# Altium PCB Omega matrix pcb1.PcbDoc
Units mm, origin at the board's own origin, x right, y up, seen from the top; angles counter-clockwise.
Board outline 50.16 x 42.67 mm, 2 copper layers (Top Layer, Bottom Layer); 13 components, 15 nets, 70 pads, 13 vias.
Unrouted connection lines stored in the file: 8.
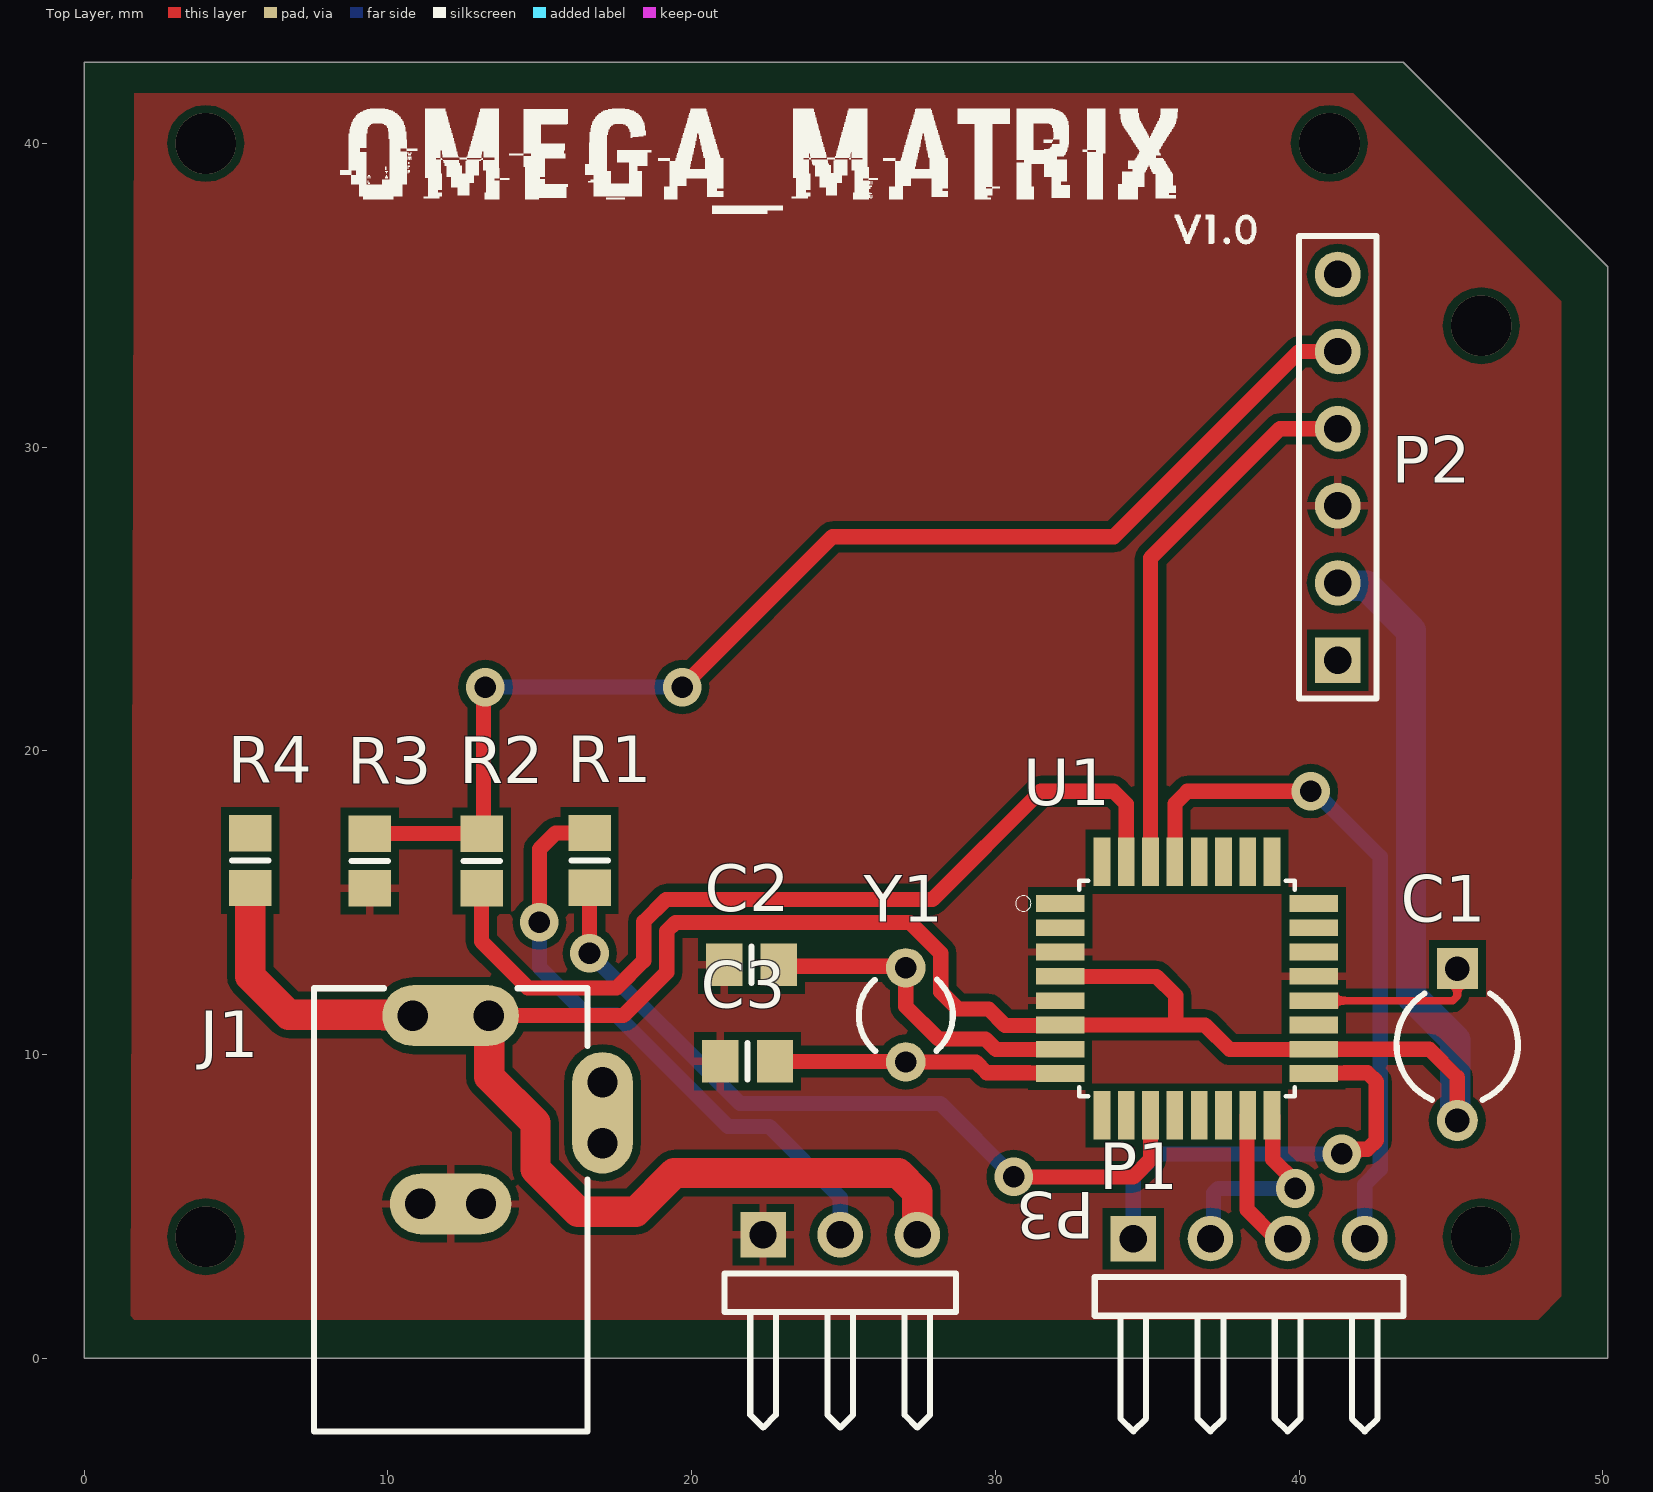
[diagram p0: Top Layer view]
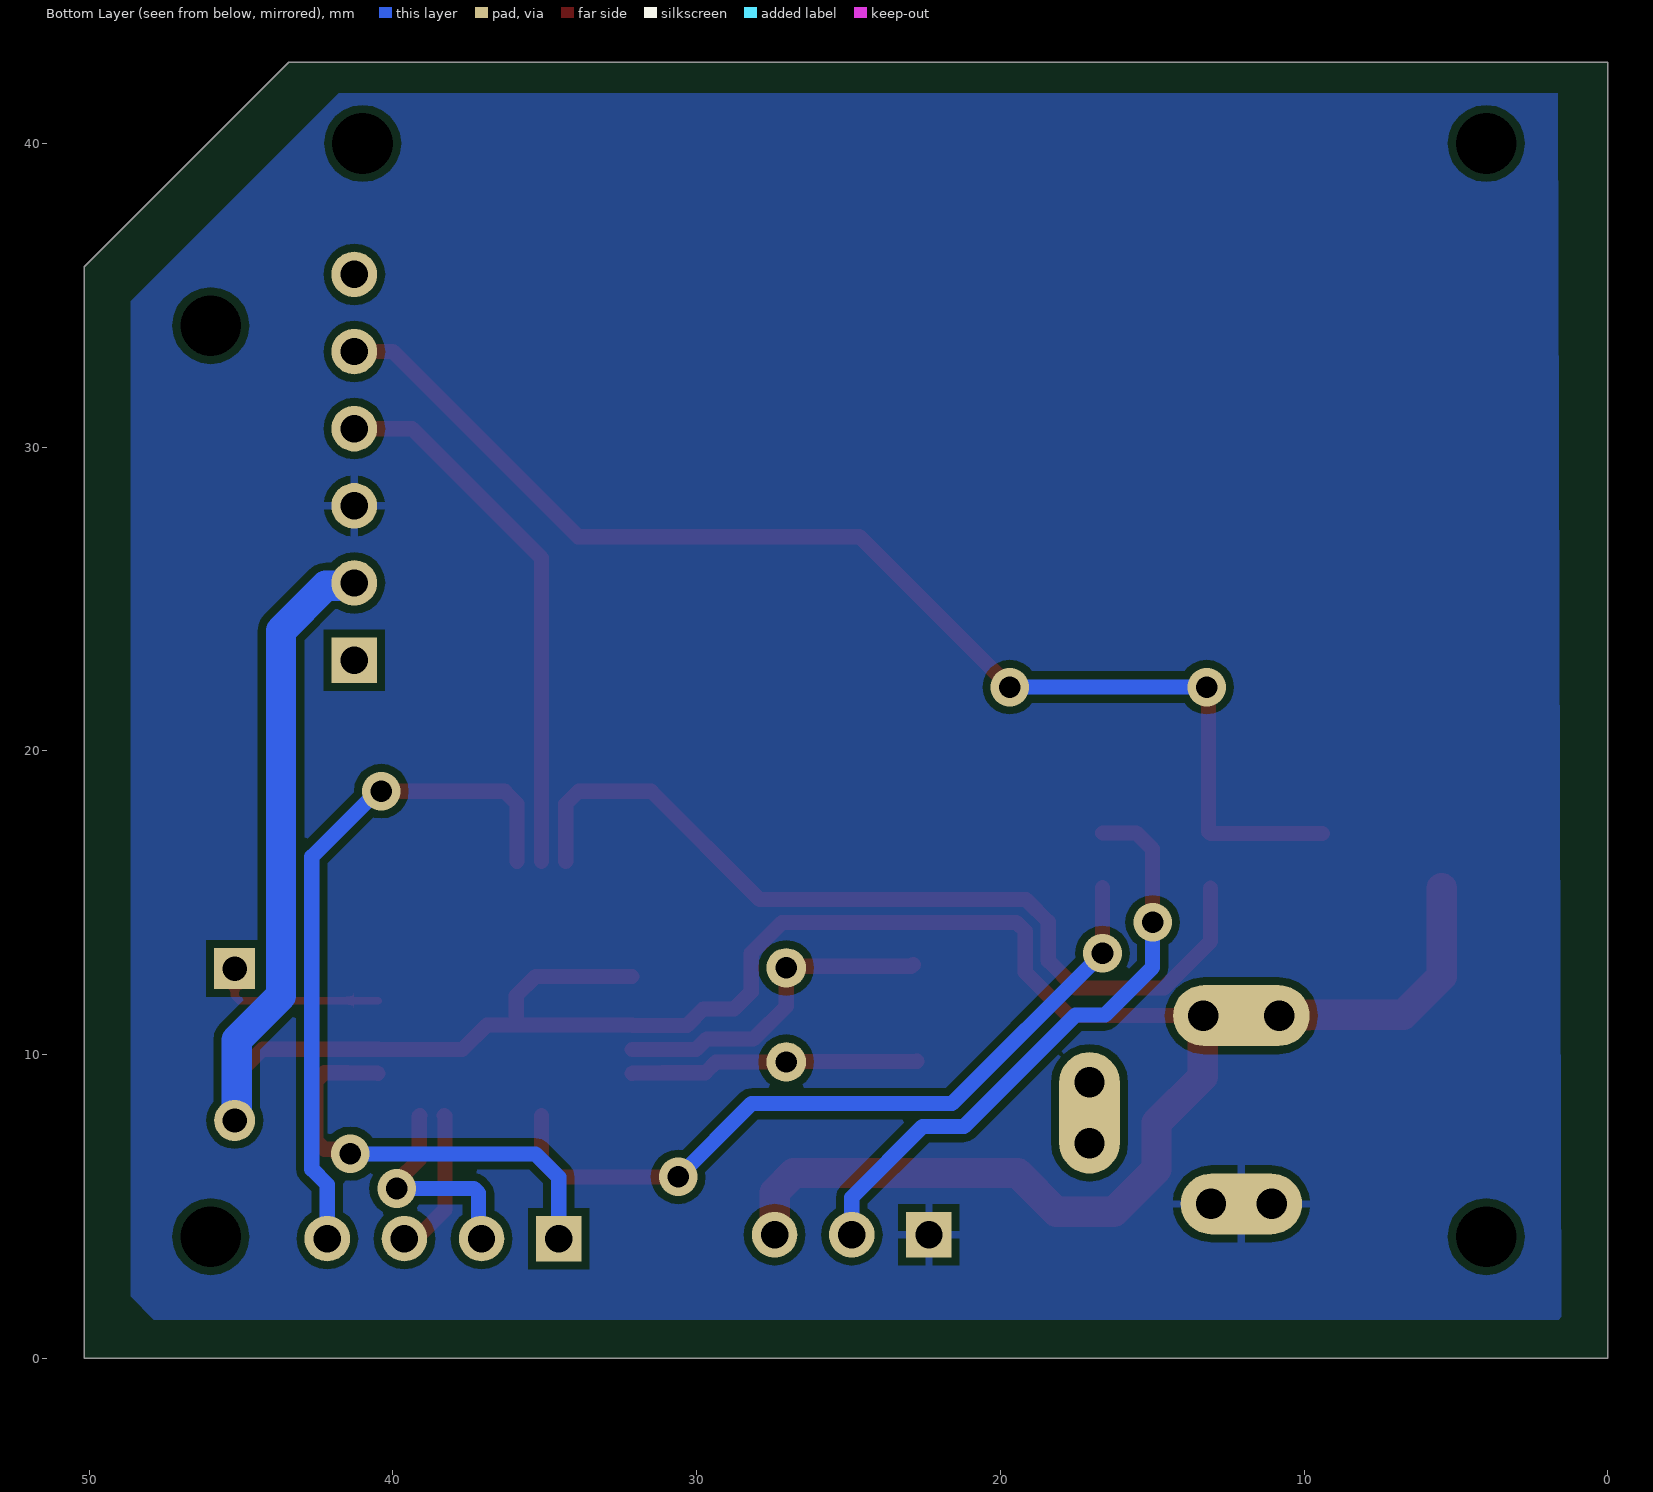
[diagram p1: Bottom Layer view, seen from below]

## Layer stack, top to bottom
Top Solder: solder mask 0.0102, Solder Resist, Dk 3.5
Top Layer: signal copper 0.0356
Dielectric 1: dielectric 0.32, FR-4, Dk 4.8
Bottom Layer: signal copper 0.0356
Bottom Solder: solder mask 0.0102, Solder Resist, Dk 3.5

## Board outline
50.165,35.941 43.434,42.672 0,42.672 0,0 50.165,0

## Design rules (kind name [scope] priority, off if disabled: settings)
Clearance [All] p1: gap=0.254 ignorepadtopadclearanceinfootprint=FALSE except(0: Arc-Hole Track-Hole SMDPad-Hole THPad-Hole Via-Hole Fill-Hole Poly-Hole Region-Hole Text-Hole)
PolygonConnect [All] p1: connectstyle=Relief reliefconductorwidth=0.254 reliefentries=4 polygonreliefangle="90 Angle" airgapwidth=0.254
RoutingVias [All] p1: holewidth=0.711 width=1.27 viastyle="Through Hole" minholewidth=0.711 minwidth=1.27 maxholewidth=0.711 maxwidth=1.27
SolderMaskExpansion [All] p1: expansion=0.102
Width POWER [InNetClass('pwr')] p1: maxlimit=2 minlimit=0.5 preferedwidth=1
Width [All] p2: maxlimit=1 minlimit=0.254 preferedwidth=0.5
30 further rules are at their usual default settings.

## Classes and differential pairs
net class pwr: "5V power" GND

## Components (designator, comment, footprint, x,y, rotation, side; value= is the part's Value field where it differs from the comment)
C1 "Cap2" CAPR5-4X5 45.212,10.327 r270 top value=47uF
C2 "Cap" 6-0805_N 21.971,12.954 r0 top value=22pF
C3 "Cap" 6-0805_N 21.844,9.779 r0 top value=22pF
J1 "PWR2.5" KLD-0202 12.065,-2.42 r90 top
P1 "Bootloader" HDR1X4H 34.544,3.937 r0 top
P2 "HC-05" HDR1X6 41.275,22.987 r90 top
P3 "Ledstrip" HDR1X3H 22.352,4.064 r0 top
R1 "Res1" 6-0805_N 16.637,16.394 r90 top value=330
R2 "Res1" 6-0805_N 13.081,16.372 r270 top value=1K
R3 "Res1" 6-0805_N 9.398,16.372 r90 top value=1.8K
R4 "Res1" 6-0805_N 5.461,16.383 r90 top value=1K
U1 "ATMEGA328PB-AU" *QFP80P900X900X120-32N 36.311,12.173 r0 top
Y1 "16MHz" R38 27.051,11.303 r0 top

## Footprints (in the part's own frame and the unit in brackets; to place one, negate y for a bottom-side part, rotate by r counter-clockwise, add the part's x,y. Pads: shape width x height; smd on the part's side, far side on the other; paste and mask are expansions set on the pad)
6-0805_N [mm] "Chip Resistor, Body 2.0x1.2mm, IPC Medium Density"
  rect 1.2x1.4 smd: 1(-0.9,0) 2(0.9,0)
  silkscreen extent 0,-0.6 0,0.6, body extent -1.07,-0.7 1.07,0.7, height 0.7
*QFP80P900X900X120-32N [mm]
  rect 1.6x0.55 smd: 1(-4.18,2.8) 2(-4.18,2) 3(-4.18,1.2) 4(-4.18,0.4) 5(-4.18,-0.4) 6(-4.18,-1.2) 7(-4.18,-2) 8(-4.18,-2.8) 17(4.18,-2.8) 18(4.18,-2) 19(4.18,-1.2) 20(4.18,-0.4) 21(4.18,0.4) 22(4.18,1.2) 23(4.18,2) 24(4.18,2.8)
  rect 0.55x1.6 smd: 9(-2.8,-4.18) 10(-2,-4.18) 11(-1.2,-4.18) 12(-0.4,-4.18) 13(0.4,-4.18) 14(1.2,-4.18) 15(2,-4.18) 16(2.8,-4.18) 25(2.8,4.18) 26(2,4.18) 27(1.2,4.18) 28(0.4,4.18) 29(-0.4,4.18) 30(-1.2,4.18) 31(-2,4.18) 32(-2.8,4.18)
  silkscreen extent -5.64,-3.55 3.55,3.55, body extent -4.51,-4.51 4.51,4.51, height 1.15
CAPR5-4X5 [mm] "Capacitor; 2 Leads"
  rect 1.35x1.35 hole 0.8: 1(-2.5,0)
  round 1.35 hole 0.8: 2(2.5,0)
  silkscreen extent -1.69,-2 1.82,2
HDR1X3H [mm] "Connector; Header; 3 Position; Right Angle"
  rect 1.5x1.5 hole 0.9: 1(0,0)
  round 1.5 hole 0.9: 2(2.54,0) 3(5.08,0)
  silkscreen extent -1.27,-6.35 6.35,-1.27
HDR1X4H [mm] "Connector; Header; 4 Position; Right Angle"
  rect 1.5x1.5 hole 0.9: 1(0,0)
  round 1.5 hole 0.9: 2(2.54,0) 3(5.08,0) 4(7.62,0)
  silkscreen extent -1.27,-6.35 8.89,-1.27
HDR1X6 [mm] "Connector; Header; 6 Position"
  rect 1.5x1.5 hole 0.9: 1(0,0)
  round 1.5 hole 0.9: 2(2.54,0) 3(5.08,0) 4(7.62,0) 5(10.16,0) 6(12.7,0)
  silkscreen extent -1.27,-1.27 13.97,1.27
KLD-0202 [mm] "DC Power Jack, 2.5mm, KLD Series, PCB Mount"
  oval 2x4.5 all layers, no hole: 1(13.7,0)
  round 1.5 hole 1: 1A(13.7,-1.25) 1B(13.7,1.25) 2A(7.5,-1) 2B(7.5,1) 3A(9.5,-5) 3B(11.5,-5)
  oval 2x4 all layers, no hole: 2(7.5,0)
  oval 4x2 all layers, no hole: 3(10.5,-5)
  silkscreen extent 0,-4.5 14.6,4.5
R38 [mm] "Crystal, Thru-Hole; 2 Leads; Body 3.1 x 8.2 mm (Dia.xH)"
  round 1.3 hole 0.7: 1(0,1.55) 2(0,-1.55)
  silkscreen extent -1.55,-1.19 1.55,1.17

## Part data
C1 C2 C3: "Capacitor", Publisher="Altium Limited"
  C1: PackageDescription="Capacitor; 2 Leads", PackageReference=CAPR5-4X5, Published=23-Sep-2002
  C2 C3: LatestRevisionDate=17-Jul-2002, LatestRevisionNote="Re-released for DXP Platform.", PackageDescription="Radial Cap, Thru-Hole; 2 Leads; 0.3 in Pin Spacing", PackageReference=RAD-0.3, Published=8-Jun-2000
J1: "Low Voltage Power Supply Connector", ComponentLink1Description="Manufacturer Link", ComponentLink1URL=http://domino.kycon.com/internet/Products.html, DatasheetDocument=09-May-2002, Published=17-Dec-2003, Publisher="Altium Limited"
P1: library part "Header 4H", "Header, 4-Pin, Right Angle", LatestRevisionDate=17-Jul-2002, LatestRevisionNote="Re-released for DXP Platform.", Publisher="Altium Limited"
P2: library part "Header 6", "Header, 6-Pin", LatestRevisionDate=17-Jul-2002, LatestRevisionNote="Re-released for DXP Platform.", Publisher="Altium Limited"
P3: library part "Header 3", "Header, 3-Pin", LatestRevisionDate=17-Jul-2002, LatestRevisionNote="Re-released for DXP Platform.", Publisher="Altium Limited"
R1 R2 R3 R4: "Resistor", LatestRevisionDate=17-Jul-2002, LatestRevisionNote="Re-released for DXP Platform.", PackageDescription="Axial Device, Thru-Hole; 2 Leads; 0.3 in Pin Spacing", PackageReference=AXIAL-0.3, Published=8-Jun-2000, Publisher="Altium Limited"
U1: "AVR AVR® ATmega Microcontroller IC 8-Bit 20MHz 32KB _16K x 16_ FLASH 32-TQFP _7x7_", Package="TQFP-32 Microchip Technology", Digi-Key_Part_Number=ATMEGA328PB-AU-ND, Digi-Key_Purchase_URL=https://www.digikey.com/product-detail/en/microchip-technology/ATMEGA328PB-AU/ATMEGA328PB-AU-ND/5638812?utm_source=snapeda&utm_medium=aggregator&utm_campaign=symbol, MF="Microchip Technology", MP=ATMEGA328PB-AU, SnapEDA_Link=https://www.snapeda.com/parts/ATMEGA328PB-AU/Microchip/view-part/4478285/?ref=snap
Y1: library part XTAL, "Crystal Oscillator", LatestRevisionDate=17-Jul-2002, LatestRevisionNote="Re-released for DXP Platform.", PackageDescription="Crystal, Thru-Hole; 2 Leads; Body 3.1 x 8.2 mm (Dia.xH)", PackageReference=R38, Published=8-Jun-2000, Publisher="Altium Limited"

## Via types
v1: diameter 1.27, hole 0.711, Top Layer to Bottom Layer, 8 vias
v2: diameter 2/1.27 (per signal layer), hole 2, Top Layer to Bottom Layer, 5 vias

## Nets (pads, with @x,y where several pads share a name; then routed paths per layer and width w, separated by ;. In a path a pad name is that pad's centre, name@x,y a point inside that pad or via, vN(x,y) a via of type N, cw(c..) or ccw(c..) an arc to the next point about the centre after c; other vN are vias at no path point)
"5V power": C1.2 J1.1 J1.1A J1.1B P2.2 P3.3 R4.1 U1.4 U1.6 U1.18 | length 93.8
  Top Layer w0.5: J1.1A 17.757,11.28 19.177,12.7 19.177,14.058 19.47,14.351 27.185,14.351 28.205,13.331 28.205,12.054 28.765,11.493 29.781,11.493 30.323,10.952 32.11,10.952 U1.6 35.941,10.973 ; U1.4 35.306,12.573 35.941,11.938 35.941,10.973 ; C1.2 45.212,9.252 44.291,10.173 U1.18 40.478,10.16 37.719,10.16 36.906,10.973 35.941,10.973
  Top Layer w1: R4.1 5.461,12.573 6.731,11.303 10.792,11.303 J1.1B ; J1.1 12.635,11.28 13.335,10.58 13.335,9.271 14.859,7.747 14.859,6.223 16.256,4.826 18.161,4.826 19.431,6.096 26.797,6.096 27.432,5.461 P3.3
  Bottom Layer w1: P2.2 41.371,25.431 42.213,25.431 43.688,23.957 43.688,11.935 45.145,10.478 45.145,7.894 C1.2
"Atmega RX": P2.4 U1.30 | length 17.9
  Top Layer w0.5: U1.30 35.111,26.348 39.37,30.607 P2.4
"Atmega TX": R2.2 U1.31 | length 29.1
  Top Layer w0.5: R2.2 13.081,13.716 14.605,12.192 17.526,12.192 18.423,13.089 18.423,14.37 19.158,15.105 27.932,15.105 31.496,18.669 33.891,18.669 34.311,18.249 U1.31
CS: P1.4 U1.29 | length 22.5
  Top Layer w0.5: U1.29 35.911,18.258 36.322,18.669 v1(40.386,18.669)
  Bottom Layer w0.5: v1(40.386,18.669) 40.513,18.669 42.672,16.51 42.672,6.223 42.164,5.715 P1.4
Data: R1.1 U1.11 | length 25.4
  Top Layer w0.5: v1(16.637,13.335) R1.1 ; v1(30.607,5.969) 34.544,5.969 35.111,6.536 U1.11
  Bottom Layer w0.5: v1(16.637,13.335) 21.59,8.382 28.194,8.382 v1(30.607,5.969)
GND: C2.1 C3.1 J1.2 J1.2A J1.2B P2.3 P3.1 R3.1 U1.3 U1.5 U1.21
MISO: P1.2 U1.16 | length 6.9
  Top Layer w0.5: U1.16 39.136,7.968 39.136,6.538 39.878,5.796 v1(39.878,5.588)
  Bottom Layer w0.5: P1.2@37.084,4.064 37.187,4.167 37.187,5.437 37.338,5.588 v1(39.878,5.588)
MOSI: P1.3 U1.15 | length 4.8
  Top Layer w0.5: U1.15 38.29,7.972 38.29,4.89 39.116,4.064 P1.3@39.624,4.064
NetC1_1: C1.1 U1.20 | length 5.7
  Top Layer w0.254: U1.20 45.063,11.773 45.212,11.922 C1.1
NetC2_2: C2.2 U1.7 Y1.1 | length 11.1
  Top Layer w0.5: C2.2 22.922,12.903 Y1.1@27,12.903 ; Y1.1 27.051,11.58 28.124,10.507 29.675,10.507 30.022,10.16 U1.7@32.118,10.16
NetC3_2: C3.2 U1.8 Y1.2 | length 9.6
  Top Layer w0.5: C3.2 22.757,9.766 27.038,9.766 Y1.2 29.363,9.753 29.718,9.398 31.118,9.398 31.122,9.394 32.11,9.394 U1.8
NetJ1_3: J1.3 J1.3A J1.3B
NetP2_5: P2.5 R2.1 R3.2 | length 41.2
  Top Layer w0.5: R3.2 R2.1 13.144,17.335 13.144,22.034 v1(13.208,22.098) ; v1(19.685,22.098) 24.638,27.051 33.909,27.051 40.005,33.147 P2.5
  Bottom Layer w0.5: v1(13.208,22.098) v1(19.685,22.098)
NetP3_2: P3.2 R1.2 | length 20
  Top Layer w0.5: v1(14.986,14.351) 14.986,16.764 15.516,17.294 R1.2
  Bottom Layer w0.5: v1(14.986,14.351) 14.986,12.866 16.549,11.303 17.526,11.303 21.201,7.628 22.559,7.628 24.892,5.295 P3.2
SCK: P1.1 U1.17 | length 14.7
  Top Layer w0.5: U1.17 40.512,9.394 41.5,9.394 41.504,9.398 42.252,9.398 42.545,9.105 42.545,7.171 42.252,6.878 41.549,6.878 v1(41.402,6.731)
  Bottom Layer w0.5: P1.1 34.544,5.969 35.302,6.727 41.398,6.727 v1(41.402,6.731)
pads on no net: P2.1 P2.6 R4.2 U1.1 U1.2 U1.9 U1.10 U1.12 U1.13 U1.14 U1.19 U1.22 U1.23 U1.24 U1.25 U1.26 U1.27 U1.28 U1.32
copper on no net:
  other v2: 4,4 46,4 46,34 4,40 41,40

## Polygon pours and split planes (outlines as drawn)
GND on Bottom Layer "Bottom Layer-GND" (solid, pour order 0): 1.653,41.656 41.783,41.656 48.641,34.798 48.641,2.032 47.879,1.27 1.524,1.27
GND on Top Layer "Top Layer-GND" (solid, pour order 2): 1.653,41.656 41.783,41.656 48.641,34.798 48.641,2.032 47.879,1.27 1.651,1.27 1.524,1.397

## Silkscreen, mask and mechanical layers (free items; w line width, h text height)
Top Overlay:
  drawing of 52 lines, arcs and shapes, not listed

## Text inside footprints (layer, text, board x,y; h text height)
J1: Mechanical 1 "Mech 2 - Clearance, move to internal plane if present" at 6.999,-2.134 h0.3 r90; Mechanical 1 "Mech 1 - Slot cut-out" at 6.499,-2.134 h0.3 r90; Mechanical 1 "Assign keep-out area to slot" at 5.499,-2.134 h0.3 r90; Mechanical 1 "Alert PCB fab to slot details" at 5.999,-2.134 h0.3 r90